# EAGLE board durtest (EAGLE 6.0)
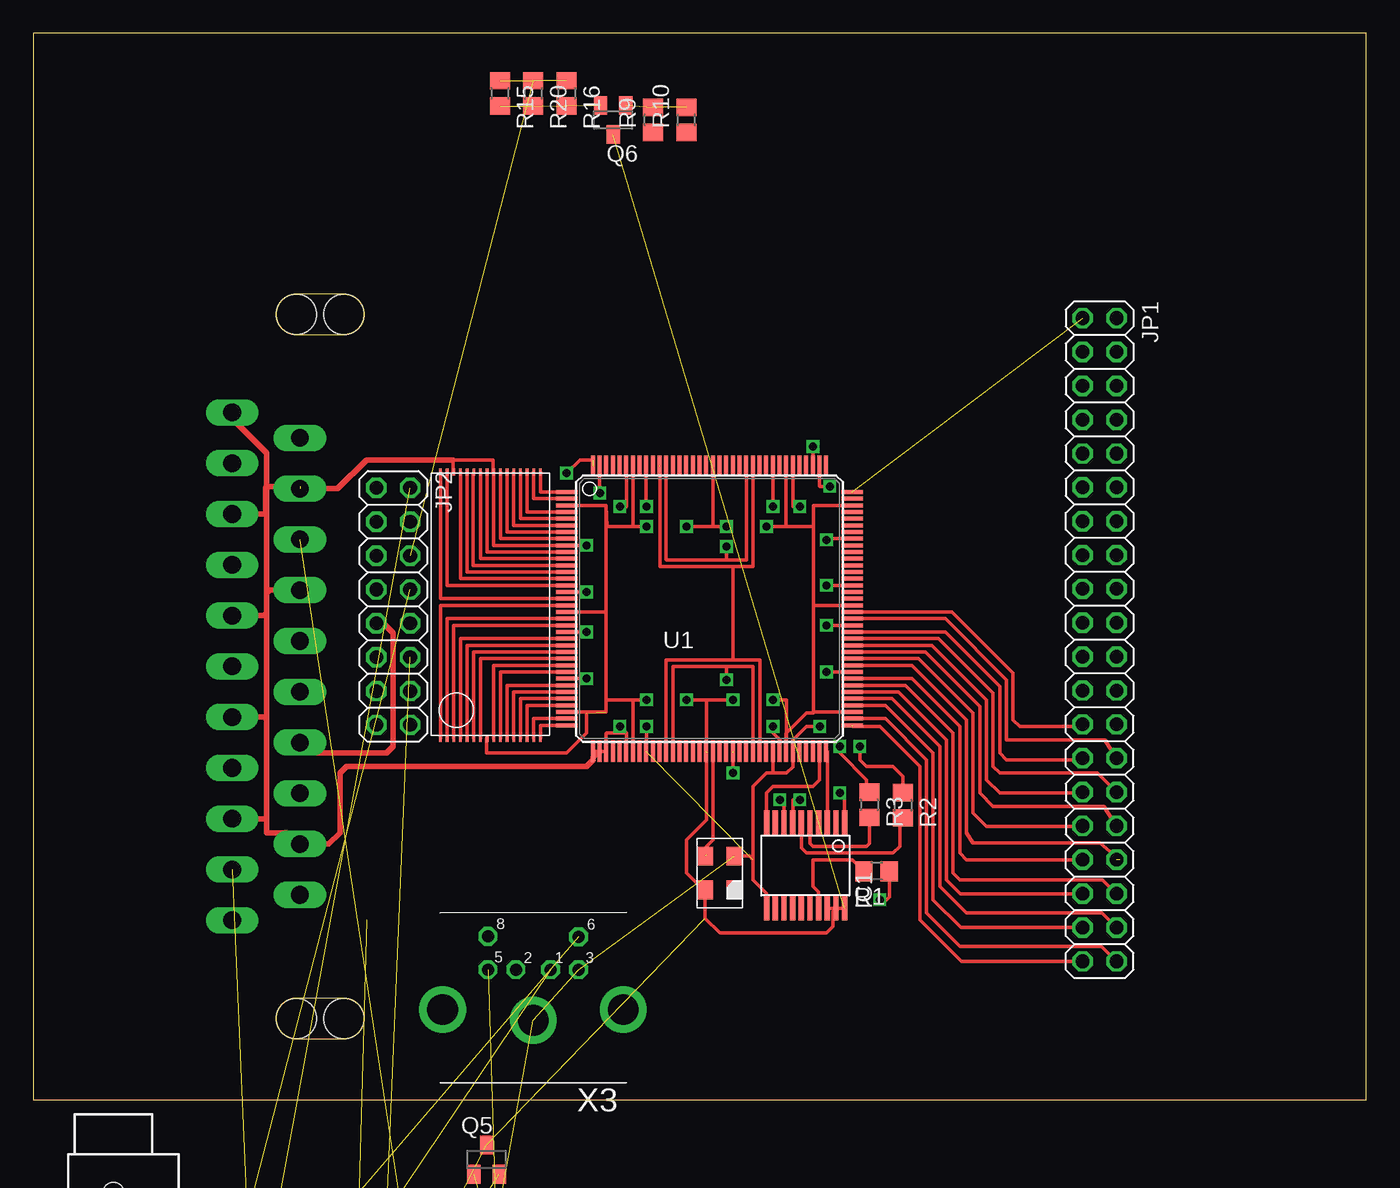
[diagram p0: board, top side]
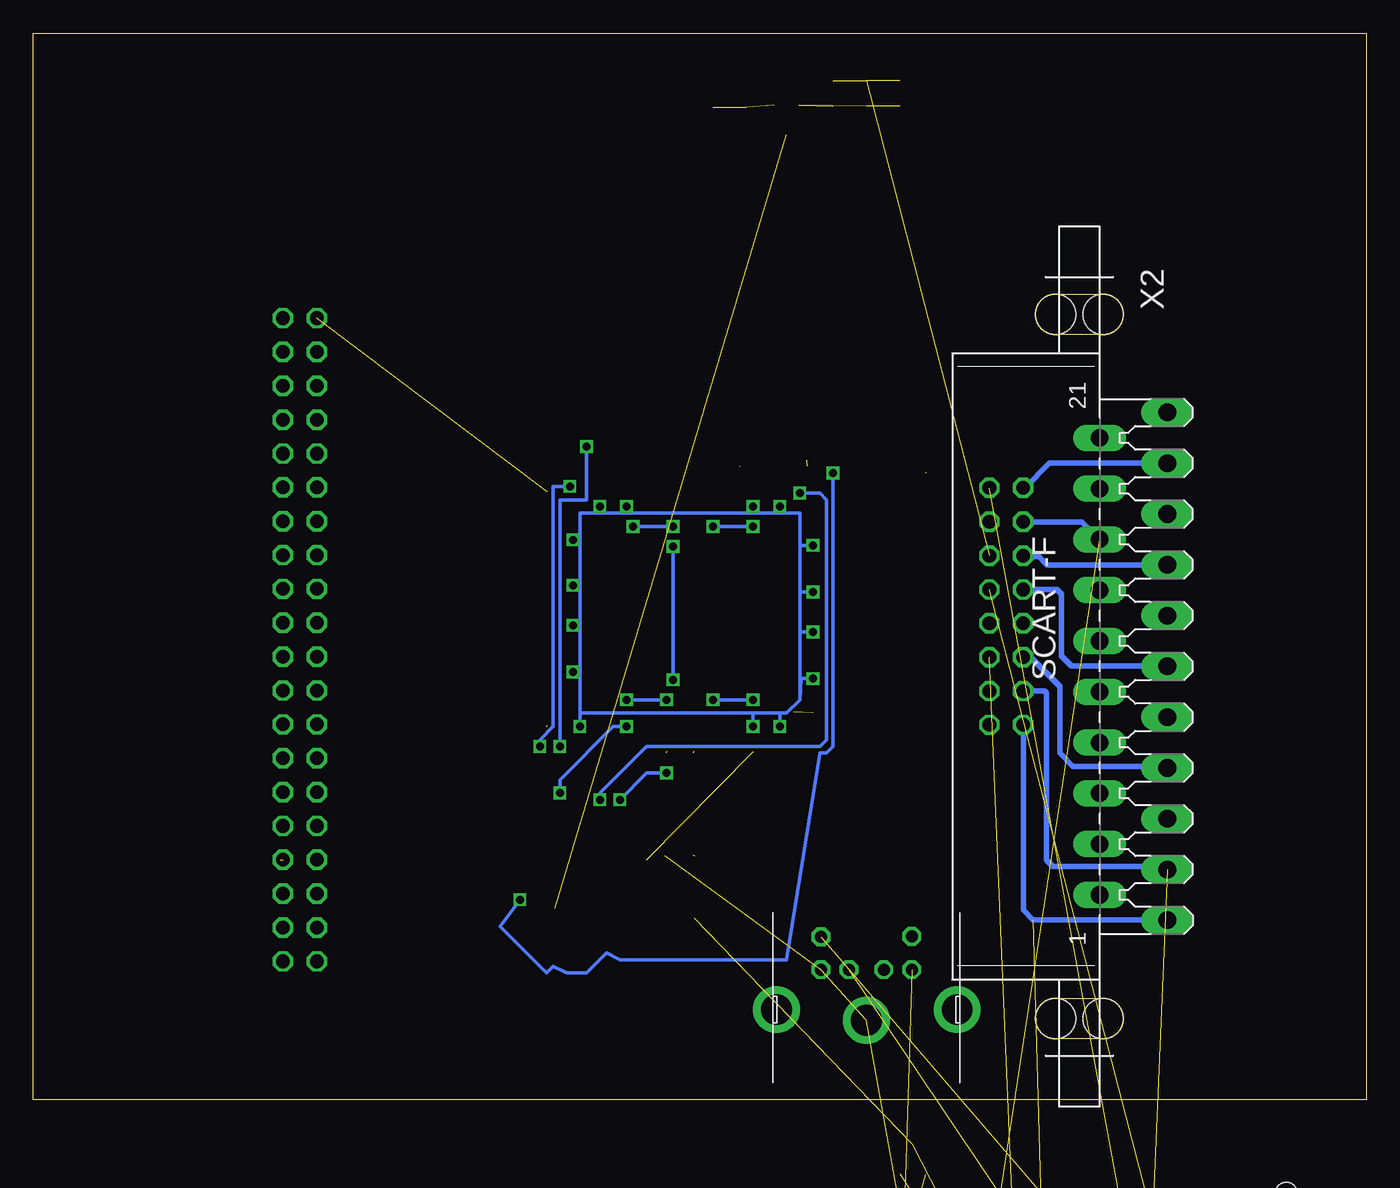
[diagram p1: board, bottom side, seen from below]

Size 100 x 80 mm. Coordinates in mm from the lower left corner, seen from the top.
Outline: 0,0 100,0 100,80 0,80 0,0
Copper layers (1*16): Top 0.0356mm / dielectric 1.5011mm / Bottom 0.0356mm
Design rules: minimum track width 6mil, minimum drill 13mil, track to track 6mil, track to pad 6mil, pad to pad 6mil, via to via 6mil, smd to smd 6mil, copper to edge 15mil, drill to drill 6mil, minimum pad ring 7mil, minimum via ring 7mil, stop-mask expansion 4mil, vias tented up to drill 0mil, thermal gap 10mil
Net classes: 1 power: width 0.6 mm, drill 1.1 mm, clearance 0.4 mm

## Footprints (pad centres in the part's own frame; a part is rotated, then mirrored left to right if it is on the bottom)
C0603 = smd 1.1 x 1: 1 -0.85,0; 2 0.85,0
VO20 = smd 0.4 x 1.8: 1 5.85,6.15; 2 5.2,6.15; 3 4.55,6.15; 4 3.9,6.15; 5 3.25,6.15; 6 2.6,6.15; 7 1.95,6.15; 8 1.3,6.15; 9 0.65,6.15; 10 0,6.15; 11 0,-0.3; 12 0.65,-0.3; 13 1.3,-0.3; 14 1.95,-0.3; 15 2.6,-0.3; 16 3.25,-0.3; 17 3.9,-0.3; 18 4.55,-0.3; 19 5.2,-0.3; 20 5.85,-0.3
2X20 = drill 1.016 octagon: 1 -24.13,-1.27; 2 -24.13,1.27; 3 -21.59,-1.27; 4 -21.59,1.27; 5 -19.05,-1.27; 6 -19.05,1.27; 7 -16.51,-1.27; 8 -16.51,1.27; 9 -13.97,-1.27; 10 -13.97,1.27; 11 -11.43,-1.27; 12 -11.43,1.27; 13 -8.89,-1.27; 14 -8.89,1.27; 15 -6.35,-1.27; 16 -6.35,1.27; 17 -3.81,-1.27; 18 -3.81,1.27; 19 -1.27,-1.27; 20 -1.27,1.27; 21 1.27,-1.27; 22 1.27,1.27; 23 3.81,-1.27; 24 3.81,1.27; 25 6.35,-1.27; 26 6.35,1.27; 27 8.89,-1.27; 28 8.89,1.27; 29 11.43,-1.27; 30 11.43,1.27; 31 13.97,-1.27; 32 13.97,1.27; 33 16.51,-1.27; 34 16.51,1.27; 35 19.05,-1.27; 36 19.05,1.27; 37 21.59,-1.27; 38 21.59,1.27; 39 24.13,-1.27; 40 24.13,1.27
2X08 = drill 1.016 octagon: 1 -8.89,-1.27; 2 -8.89,1.27; 3 -6.35,-1.27; 4 -6.35,1.27; 5 -3.81,-1.27; 6 -3.81,1.27; 7 -1.27,-1.27; 8 -1.27,1.27; 9 1.27,-1.27; 10 1.27,1.27; 11 3.81,-1.27; 12 3.81,1.27; 13 6.35,-1.27; 14 6.35,1.27; 15 8.89,-1.27; 16 8.89,1.27
SOT23 = smd 1 x 1.4: 1 -0.95,-1.1; 2 0.95,-1.1; 3 0,1.1
R0805 = smd 1.3 x 1.5: 1 -0.95,0; 2 0.95,0
M0805 = smd 1.3 x 1.6: 1 -0.95,0; 2 0.95,0
SOT-23 = smd 0.787 x 0.889: 1 0.025,-1.016; 2 -0.94,1.016; 3 0.991,1.016
TQ144 = smd 1.6 x 0.3: P1 -10.7,8.75; P2 -10.7,8.25; P3 -10.7,7.75; P4 -10.7,7.25; P5 -10.7,6.75; P6 -10.7,6.25; P7 -10.7,5.75; P8 -10.7,5.25; P9 -10.7,4.75; P10 -10.7,4.25; P11 -10.7,3.75; P12 -10.7,3.25; P13 -10.7,2.75; P14 -10.7,2.25; P15 -10.7,1.75; P16 -10.7,1.25; P17 -10.7,0.75; P18 -10.7,0.25; P19 -10.7,-0.25; P20 -10.7,-0.75; P21 -10.7,-1.25; P22 -10.7,-1.75; P23 -10.7,-2.25; P24 -10.7,-2.75; P25 -10.7,-3.25; P26 -10.7,-3.75; P27 -10.7,-4.25; P28 -10.7,-4.75; P29 -10.7,-5.25; P30 -10.7,-5.75; P31 -10.7,-6.25; P32 -10.7,-6.75; P33 -10.7,-7.25; P34 -10.7,-7.75; P35 -10.7,-8.25; P36 -10.7,-8.75; P73 10.7,-8.75; P74 10.7,-8.25; P75 10.7,-7.75; P76 10.7,-7.25; P77 10.7,-6.75; P78 10.7,-6.25; P79 10.7,-5.75; P80 10.7,-5.25; P81 10.7,-4.75; P82 10.7,-4.25; P83 10.7,-3.75; P84 10.7,-3.25; P85 10.7,-2.75; P86 10.7,-2.25; P87 10.7,-1.75; P88 10.7,-1.25; P89 10.7,-0.75; P90 10.7,-0.25; P91 10.7,0.25; P92 10.7,0.75; P93 10.7,1.25; P94 10.7,1.75; P95 10.7,2.25; P96 10.7,2.75; P97 10.7,3.25; P98 10.7,3.75; P99 10.7,4.25; P100 10.7,4.75; P101 10.7,5.25; P102 10.7,5.75; P103 10.7,6.25; P104 10.7,6.75; P105 10.7,7.25; P106 10.7,7.75; P107 10.7,8.25; P108 10.7,8.75 | smd 0.3 x 1.6: P37 -8.75,-10.7; P38 -8.25,-10.7; P39 -7.75,-10.7; P40 -7.25,-10.7; P41 -6.75,-10.7; P42 -6.25,-10.7; P43 -5.75,-10.7; P44 -5.25,-10.7; P45 -4.75,-10.7; P46 -4.25,-10.7; P47 -3.75,-10.7; P48 -3.25,-10.7; P49 -2.75,-10.7; P50 -2.25,-10.7; P51 -1.75,-10.7; P52 -1.25,-10.7; P53 -0.75,-10.7; P54 -0.25,-10.7; P55 0.25,-10.7; P56 0.75,-10.7; P57 1.25,-10.7; P58 1.75,-10.7; P59 2.25,-10.7; P60 2.75,-10.7; P61 3.25,-10.7; P62 3.75,-10.7; P63 4.25,-10.7; P64 4.75,-10.7; P65 5.25,-10.7; P66 5.75,-10.7; P67 6.25,-10.7; P68 6.75,-10.7; P69 7.25,-10.7; P70 7.75,-10.7; P71 8.25,-10.7; P72 8.75,-10.7; P109 8.75,10.7; P110 8.25,10.7; P111 7.75,10.7; P112 7.25,10.7; P113 6.75,10.7; P114 6.25,10.7; P115 5.75,10.7; P116 5.25,10.7; P117 4.75,10.7; P118 4.25,10.7; P119 3.75,10.7; P120 3.25,10.7; P121 2.75,10.7; P122 2.25,10.7; P123 1.75,10.7; P124 1.25,10.7; P125 0.75,10.7; P126 0.25,10.7; P127 -0.25,10.7; P128 -0.75,10.7; P129 -1.25,10.7; P130 -1.75,10.7; P131 -2.25,10.7; P132 -2.75,10.7; P133 -3.25,10.7; P134 -3.75,10.7; P135 -4.25,10.7; P136 -4.75,10.7; P137 -5.25,10.7; P138 -5.75,10.7; P139 -6.25,10.7; P140 -6.75,10.7; P141 -7.25,10.7; P142 -7.75,10.7; P143 -8.25,10.7; P144 -8.75,10.7
TSOP32 = smd 0.5 x 0.2: P1 -9.75,3.75; P2 -9.75,3.25; P3 -9.75,2.75; P4 -9.75,2.25; P5 -9.75,1.75; P6 -9.75,1.25; P7 -9.75,0.75; P8 -9.75,0.25; P9 -9.75,-0.25; P10 -9.75,-0.75; P11 -9.75,-1.25; P12 -9.75,-1.75; P13 -9.75,-2.25; P14 -9.75,-2.75; P15 -9.75,-3.25; P16 -9.75,-3.75; P17 10.25,-3.75; P18 10.25,-3.25; P19 10.25,-2.75; P20 10.25,-2.25; P21 10.25,-1.75; P22 10.25,-1.25; P23 10.25,-0.75; P24 10.25,-0.25; P25 10.25,0.25; P26 10.25,0.75; P27 10.25,1.25; P28 10.25,1.75; P29 10.25,2.25; P30 10.25,2.75; P31 10.25,3.25; P32 10.25,3.75
OSC_7C = smd 1.4 x 1.2: ENA -1.27,-1.1; GND 1.27,-1.1; OUT 1.27,1.1; VDD -1.27,1.1
1503_04 = drill 0.8 pad 1.2 long: 1 3.9,-10.25; 2 0.65,-10.25 | drill 1 pad 1.2 long: 3 -2.3,-10.25 | hole 1.6: 0,0
SCART-F = drill 1.321 long: 1 19.05,5.08; 2 17.145,0; 3 15.24,5.08; 4 13.335,0; 5 11.43,5.08; 6 9.525,0; 7 7.62,5.08; 8 5.715,0; 9 3.81,5.08; 10 1.905,0; 11 0,5.08; 12 -1.905,0; 13 -3.81,5.08; 14 -5.715,0; 15 -7.62,5.08; 16 -9.525,0; 17 -11.43,5.08; 18 -13.335,0; 19 -15.24,5.08; 20 -17.145,0; 21 -19.05,5.08 | hole 3.023: 26.416,0.254; 26.416,-3.302; -26.416,0.254; -26.416,-3.302
M_DIN6 = drill 0.9 pad 1.422 octagon: 1 -1.3,-3.75; 2 1.3,-3.75; 3 -3.4,-3.75; 5 3.4,-3.75; 6 -3.4,-6.2; 8 3.4,-6.25 | drill 2.3 pad 3.5: SH1 6.8,-0.75; SH2 0,0.05; SH3 -6.75,-0.75

## Placement (x,y rotation side)
C2  100nF  [C0603]  12,-56 0 top  (outside the outline)
C3  [C0603]  28.5,-56 0 top  (outside the outline)
C4  [C0603]  32,-56 0 top  (outside the outline)
IC1  XCF02S  [VO20]  55.02,14.63 0 top
JP1  [2X20]  80,34.5 270 top
JP2  [2X08]  27,37 270 top
Q5  BC848SMD  [SOT23]  34,-4.5 0 top  (outside the outline)
Q6  BC848SMD  [SOT23]  43.5,73.5 180 top
Q7  BC848SMD  [SOT23]  13.5,-23 0 top  (outside the outline)
Q8  BC848SMD  [SOT23]  24.5,-23 0 top  (outside the outline)
R1  100  [R0805]  63.27,17.14 180 top
R2  100  [R0805]  65.24,22.08 270 top
R3  100  [R0805]  62.72,22.12 270 top
R4  10K  [R0805]  29.5,-50 0 top  (outside the outline)
R5  10K  [R0805]  35,-50 0 top  (outside the outline)
R6  10K  [R0805]  40.5,-50 0 top  (outside the outline)
R7  10K  [R0805]  2,-56.5 0 top  (outside the outline)
R8  2200  [R0805]  39,-30 0 top  (outside the outline)
R9  2200  [R0805]  46.5,73.5 90 top
R10  1000  [R0805]  49,73.5 90 top
R11  75  [R0805]  7.5,-56.5 0 top  (outside the outline)
R12  750  [R0805]  32,-43.5 0 top  (outside the outline)
R13  680  [R0805]  37.5,-43.5 0 top  (outside the outline)
R14  2200  [R0805]  14,-37 0 top  (outside the outline)
R15  270  [R0805]  35,75.5 270 top
R16  680  [R0805]  40,75.5 270 top
R17  10000  [R0805]  18,-30 0 top  (outside the outline)
R18  4700  [R0805]  20,-37 0 top  (outside the outline)
R19  10000  [R0805]  25,-30 0 top  (outside the outline)
R20  4700  [R0805]  37.5,75.5 270 top
R21  47000  [R0805]  32,-30 0 top  (outside the outline)
R22  1000  [R0805]  32,-37 0 top  (outside the outline)
R23  [M0805]  19,-56 0 top  (outside the outline)
R24  2200  [R0805]  38,-37 0 top  (outside the outline)
R25  1000  [R0805]  2,-43.5 0 top  (outside the outline)
R26  270  [R0805]  7.5,-50 0 top  (outside the outline)
R27  680  [R0805]  13,-50 0 top  (outside the outline)
R28  4700  [R0805]  8,-43.5 0 top  (outside the outline)
R29  2200  [R0805]  14,-43.5 0 top  (outside the outline)
R30  1000  [R0805]  20,-43.5 0 top  (outside the outline)
R31  270  [R0805]  18.5,-50 0 top  (outside the outline)
R32  680  [R0805]  24,-50 0 top  (outside the outline)
R33  4700  [R0805]  26,-43.5 0 top  (outside the outline)
R34  [M0805]  24,-56 0 top  (outside the outline)
T1  BSS138  [SOT-23]  2,-32 0 top  (outside the outline)
T2  BC848  [SOT23]  35.5,-23 0 top  (outside the outline)
T3  BSS138  [SOT-23]  10,-32 0 top  (outside the outline)
U1  XC3S400TQ144  [TQ144]  50.73,36.83 0 top
U$1  AS6C4008  [TSOP32]  34.29,36.83 90 top
U$2  TXO_7C  [OSC_7C]  51.5,17 90 top
X1  1503_04  [1503_04]  6,-7 0 top  (outside the outline)
X2  SCART-F  [SCART-F]  20,32.5 270 bottom
X3  [M_DIN6]  37.5,6 180 top

## Library data of the parts
C2-C4 R23 R34 = resistor
IC1 = smd-special
JP1 JP2 = pinhead
Q5-Q8 = bc548
R1-R22 R24-R33 = rcl
T1 T3 = zetex; OC_FARNELL: unknown; OC_NEWARK: unknown
T2 = transistor
U1 = xilinx_spartan3_virtex4_and_5
U$1 U$2 = cpcfpga
X1 = con-lumberg; OC_FARNELL: 1216981; OC_NEWARK: unknown
X2 = con-hirschmann; OC_FARNELL: unknown; OC_NEWARK: unknown
X3 = mini_din

## Nets
AINLEFT: X2.6
AINRIGHT: X2.2
AOUTLEFT: JP2.13 R23.1 X2.3
AOUTRIGHT: JP2.15 R34.1 X2.1
AUDLEFT: C3.2
AUDRIGHT: C4.2
B0: R30.1
B1: R29.1
BLUE: JP2.11 X2.7
CASIN: R21.2 T2.2
CLK_5V: R5.1 T1.1 X3.6
COMPIN: X2.20
COMPOUT: JP2.1 X2.19
CSYNC: R8.1
D_FASTBLANKING: JP2.3 R11.1 R12.2 X2.16
D_MODESWITCH: JP2.9 X2.8
DATA_5V: R7.1 T3.1 X3.1
G0: R25.1
G1: R24.1
GND: IC1.11 R12.1 R17.1 R19.1 R21.1 U1.P9 U1.P16 U1.P22 U1.P29 U1.P37 U1.P38 U1.P39 U1.P42 U1.P45 U1.P64 U1.P67 U1.P81 U1.P88 U1.P94 U1.P101 U1.P114 U1.P117 U1.P136 U1.P139 U$1.P24 U$1.P30 U$2.GND X1.3 X2.4 X2.5 X2.9 X2.13 X2.14 X2.17 X2.18 X2.21 X3.3 X3.SH2
GREEN: JP2.7 X2.11
N$1: U1.P1 U$1.P17
N$2: U1.P2 U$1.P18
N$3: U1.P4 U$1.P19
N$4: U1.P5 U$1.P20
N$5: U1.P6 U$1.P21
N$6: U1.P7 U$1.P22
N$7: U1.P8 U$1.P23
N$8: U1.P10 U$1.P25
N$9: U1.P11 U$1.P26
N$10: U1.P12 U$1.P27
N$11: U1.P13 U$1.P28
N$12: U1.P14 U$1.P29
N$13: U1.P15 U$1.P31
N$14: U1.P17 U$1.P32
N$15: U1.P18 U$1.P1
N$16: U1.P20 U$1.P2
N$17: U1.P21 U$1.P3
N$18: U1.P23 U$1.P4
N$19: U1.P24 U$1.P5
N$20: U1.P25 U$1.P6
N$21: U1.P26 U$1.P7
N$22: U1.P27 U$1.P9
N$23: U1.P28 U$1.P10
N$24: U1.P30 U$1.P11
N$25: U1.P31 U$1.P12
N$26: U1.P32 U$1.P13
N$27: U1.P33 U$1.P14
N$28: U1.P35 U$1.P15
N$29: U1.P36 U$1.P16
N$30: JP1.1 U1.P108
N$31: JP1.39 U1.P73
N$32: JP1.40 U1.P74
N$33: JP1.37 U1.P76
N$34: JP1.38 U1.P77
N$35: IC1.3 U1.P72
N$36: IC1.17 R1.2
N$37: JP1.35 U1.P78
N$38: IC1.10 U1.P71
N$39: R2.1 U1.P110
N$40: IC1.7 U1.P143
N$41: JP1.36 U1.P79
N$42: R1.1 U1.P144
N$43: R3.1 U1.P111
N$44: JP1.33 U1.P80
N$45: JP1.34 U1.P82
N$46: JP1.31 U1.P83
N$47: JP1.32 U1.P84
N$48: JP1.29 U1.P85
N$49: JP1.30 U1.P86
N$50: JP1.27 U1.P87
N$51: JP1.28 U1.P89
N$52: JP1.25 U1.P90
N$53: Q6.1 R9.2 R10.2
N$54: Q6.2 R15.2 R16.2 R20.2
N$55: Q8.1 R24.2 R25.2
N$56: Q8.2 R26.2 R27.2 R28.2
N$57: Q7.1 R29.2 R30.2
N$58: Q7.2 R31.2 R32.2 R33.2
N$59: Q5.2 R13.2 R14.2
N$60: C2.2 R18.1 R19.2 T2.1
N$61: C2.1 R17.2 X1.1
N$62: R18.2 R22.2
N$63: Q5.1 R8.2
N$64: C3.1 R23.2
N$65: C4.1 R34.2
N$66: U1.P55 U$2.OUT
PE1: X3.SH1
PE3: X3.SH3
PROM_DO: IC1.1 U1.P65
PROM_INITB: IC1.8 U1.P58
PS2CLK: R4.1 T1.2
PS2DAT: R6.1 T3.2
R0: R10.1
R1: R9.1
RED: JP2.5 X2.15
SCART_BLANKING: JP2.4
SCART_BLUE: JP2.12 R31.1 R32.1 R33.1
SCART_COMP: JP2.2 R13.1 R14.1
SCART_GREEN: JP2.8 R26.1 R27.1 R28.1
SCART_LEFT: JP2.14
SCART_MODE: JP2.10
SCART_RED: JP2.6 R15.1 R16.1 R20.1
SCART_RIGHT: JP2.16
TCK: IC1.6 R2.2
TDI: IC1.4
TDO: U1.P109
TMS: IC1.5 R3.2
VCC: IC1.18 IC1.19 IC1.20 Q5.3 Q6.3 Q7.3 Q8.3 U1.P3 U1.P19 U1.P34 U1.P43 U1.P54 U1.P66 U1.P75 U1.P91 U1.P106 U1.P115 U1.P126 U1.P138 U$1.P8 U$2.VDD
VCC_5V [power]: R5.2 R7.2 X3.5
VCC_B2: R4.2 R6.2 R22.1 T1.3 T2.3 T3.3
VCC_B3: R11.2
VCCAUX: U1.P48 U1.P62 U1.P120 U1.P134
VCCINT: U1.P49 U1.P61 U1.P121 U1.P133

## Tracks (layer width: path | path; a pad name or v marks a point on that pad's centre or on a via)
AOUTLEFT  (1 unrouted)
  Bottom 0.406: JP2.13 24.15,30.65 24,30.5 24,18 23.5,17.5 15.16,17.5 X2.3
AOUTRIGHT  (1 unrouted)
  Bottom 0.406: JP2.15 25.73,14.23 25,13.5 14.97,13.5 X2.1
BLUE
  Bottom 0.406: JP2.11 25.19,33.19 23,31 23,26 22,25 15.04,25 X2.7
CASIN  (1 unrouted)
CLK_5V  (2 unrouted)
COMPOUT
  Bottom 0.406: JP2.1 25.61,45.89 23.76,47.74 X2.19
D_FASTBLANKING  (2 unrouted)
  Bottom 0.406: JP2.3 21.32,43.35 X2.16
D_MODESWITCH
  Top 0.406: JP2.9 26.27,35.73 27,35 27,26.5 26.5,26 20.79,26 X2.8
DATA_5V  (2 unrouted)
GND  (via drill 0.6)  (9 unrouted)
  Top 0.254: IC1.11 55.02,15.48 54,16.5 54,18 | 54,18 54,23.5 55,24.5 55.5,24.5 | 55.5,24.5 55.5,26.11 U1.P64 | 55.5,24.5 56.5,24.5 56.98,24.98 U1.P67 56.98,26.98 58,28 v59,28 | U1.P139 44.5,47.53 44.5,44.5 v44,44.5 | U1.P16 v41.5,38.08 | v41.5,41.58 U1.P9 34.54,41.58 U$1.P24 34.5,47.08 34.5,48 31.5,48 31.5,47.08 U$1.P30 | U1.P22 v41.5,35.08 | U1.P29 v41.5,31.58 | U1.P94 v59.5,38.58 | U1.P81 v59.5,32.08 | U1.P88 v59.5,35.58 | U1.P45 46,26.13 v46,28 | U1.P42 44.5,26.13 44.5,27.5 | 44.5,27.5 v44,28 | U1.P37 U1.P38 U1.P39 42.98,27.48 43,27.5 44.5,27.5 | U1.P136 45.98,44.52 v46,44.5 | U1.P114 56.98,46.52 57,45 57,44.5 v57.5,44.5 | U1.P117 55.48,46.52 v55.5,44.5 | U1.P101 59.58,42.08 v59.5,42 | U$2.GND 53.73,18.27 54,18
  Top 0.406: X2.18 22.84,45.84 25,48 31.5,48 | X2.4 22.16,19.16 23,20 23,24.5 23.5,25 41.5,25 42,25.5 42,25.66 U1.P38 | X2.21 14.92,51.08 17.5,48.5 17.5,46 | 17.5,46 17.5,44 | 17.5,44 17.5,38 | 17.5,38 17.5,36.5 | 17.5,36.5 17.5,28.5 | 17.5,28.5 17.5,21 | 17.5,21 17.5,20 19,20 20,19 | 17.5,44 17.43,43.93 17.43,44 | X2.14 17.71,38.22 17.5,38 | X2.13 17.31,36.31 17.5,36.5 | X2.9 17.31,28.69 17.5,28.5 | 17.43,44 17.43,45.93 17.5,46 | 17.5,46 20,46 | X2.17 17.36,43.93 17.43,44 | X2.5 17.43,21.07 17.5,21
  Bottom 0.254: v41.5,41.58 42.42,41.58 | 42.42,41.58 42.5,41.5 42.5,38 | v41.5,38.08 42.42,38.08 42.5,38 | v41.5,35.08 42.42,35.08 42.5,35 | 42.5,35 42.5,38 | v41.5,31.58 42.42,31.58 42.5,30 | 42.5,30 42.5,35 | v44,28 44,29 | 44,29 43.5,29 42.5,30 | v46,28 46,29 | 46,29 44,29 | 42.42,41.58 42.5,41.66 42.5,44 44,44 | 44,44 v44,44.5 | v46,44.5 46,44 | 46,44 44,44 | v57.5,44.5 57.5,44 | 57.5,44 59,44 59,42 | 59,42 59,38.5 | 59,35.5 59,32 | 59,32 59,29 | v55.5,44.5 55.5,44 | 55.5,44 57.5,44 | v59.5,42 59,42 | v59.5,38.58 59.08,38.58 59,38.5 | v59.5,35.58 59.08,35.58 59,35.5 | v59.5,32.08 59.08,32.08 59,32 | 59,35.5 59,38.5 | 55.5,44 46,44 | 59,29 46,29 | v59,28 59,29
GREEN
  Bottom 0.406: JP2.7 23.22,38.27 22.89,37.94 22.89,33.29 22.12,32.52 14.95,32.52 X2.11
N$1
  Top 0.254: U1.P1 38.04,45.58 U$1.P17
N$2
  Top 0.254: U1.P2 37.54,45.08 U$1.P18
N$3
  Top 0.254: U1.P4 37.04,44.08 U$1.P19
N$4
  Top 0.254: U1.P5 36.54,43.58 U$1.P20
N$5
  Top 0.254: U1.P6 36.04,43.08 U$1.P21
N$6
  Top 0.254: U1.P7 35.54,42.58 U$1.P22
N$7
  Top 0.254: U1.P8 35.04,42.08 U$1.P23
N$8
  Top 0.254: U1.P10 34.04,41.08 U$1.P25
N$9
  Top 0.254: U1.P11 33.54,40.58 U$1.P26
N$10  (1 unrouted)
  Top 0.254: U1.P12 33,40.08 33,47
N$11
  Top 0.254: U1.P13 32.54,39.58 U$1.P28
N$12
  Top 0.254: U1.P14 32.04,39.08 U$1.P29
N$13
  Top 0.254: U1.P15 31.04,38.58 U$1.P31
N$14
  Top 0.254: U1.P17 30.54,37.58 U$1.P32
N$15
  Top 0.254: U1.P18 30.54,37.08 U$1.P1
N$16
  Top 0.254: U1.P20 31.04,36.08 U$1.P2
N$17
  Top 0.254: U1.P21 31.54,35.58 U$1.P3
N$18
  Top 0.254: U1.P23 32.04,34.58 U$1.P4
N$19
  Top 0.254: U1.P24 32.54,34.08 U$1.P5
N$20
  Top 0.254: U1.P25 33.04,33.58 U$1.P6
N$21
  Top 0.254: U1.P26 33.54,33.08 U$1.P7
N$22
  Top 0.254: U1.P27 34.54,32.58 U$1.P9
N$23
  Top 0.254: U1.P28 35.04,32.08 U$1.P10
N$24
  Top 0.254: U1.P30 35.54,31.08 U$1.P11
N$25
  Top 0.254: U1.P31 36.04,30.58 U$1.P12
N$26
  Top 0.254: U1.P32 36.54,30.08 U$1.P13
N$27
  Top 0.254: U1.P33 37.04,29.58 U$1.P14
N$28
  Top 0.254: U1.P35 37.54,28.58 U$1.P15
N$29
  Top 0.254: U1.P36 38.04,28.08 U$1.P16
N$30  (1 unrouted)
N$31  (1 unrouted)
  Top 0.254: JP1.39 69.63,10.37 66.5,13.5 66.5,25 63.5,28 61.5,28
N$32
  Top 0.254: U1.P74 63.92,28.58 67,25.5 67,14 69.5,11.5 80.14,11.5 JP1.40
N$33
  Top 0.254: JP1.37 69.59,12.91 67.5,15 67.5,26 63.92,29.58 U1.P76
N$34
  Top 0.254: U1.P77 64.42,30.08 68,26.5 68,16 70,14 80.18,14 JP1.38
N$35
  Top 0.254: U1.P72 59.57,26.13 IC1.3
N$36
  Top 0.254: IC1.17 58.92,15.58 58.5,16 58.5,18 61.45,18 R1.2
N$37
  Top 0.254: JP1.35 69.55,15.45 68.5,16.5 68.5,27 64.92,30.58 U1.P78
N$38
  Top 0.254: U1.P71 58.98,23.98 58.5,23.5 55.5,23.5 55,23 55,20.8 IC1.10
N$39  (via drill 0.6)
  Top 0.254: U1.P110 58.98,46.02 59,46 v59.75,46.01 | v62,26.5 62,25.5 62.5,25 64.5,25 65.24,24.26 R2.1
  Bottom 0.254: v59.75,46.01 61,46 61,28 62,27 v62,26.5
N$40  (via drill 0.6)
  Top 0.254: U1.P143 42.48,46.02 42.5,46 v42.5,45.5 | v57.5,22.5 57,22.5 57,20.81 IC1.7
  Bottom 0.254: v42.5,45.5 41,45.5 40.5,45 40.5,27 41,26.5 54,26.5 57.5,23 v57.5,22.5
N$41
  Top 0.254: U1.P79 65.42,31.08 69,27.5 69,17 69.5,16.5 80.22,16.5 JP1.36
N$42  (via drill 0.6)  (1 unrouted)
  Top 0.254: R1.1 64.22,15.22 64,15 v63.5,15 | v40,47 41,48 42,48
  Bottom 0.254: v63.5,15 65,13 61.5,9.5 61,10 60,9.5 58.5,9.5 57,11 56,10.5 43.5,10.5 41,26 40.5,26 40,26.5 v40,47
N$43  (via drill 0.6)
  Top 0.254: U1.P111 58.48,48.98 v58.5,49 | 62.66,23 R3.1 62.5,23.29 62.5,24 60.5,26 v60.5,26.5
  Bottom 0.254: v58.5,49 58.5,45 60.5,45 v60.5,26.5
N$44
  Top 0.254: U1.P80 65.92,31.58 69.5,28 69.5,18.5 70,18 JP1.33
N$45  (1 unrouted)
  Top 0.254: U1.P82 65.92,32.58 70,28.5 70,20 70.5,19.25 80,19.25 81.5,18
N$46
  Top 0.254: U1.P83 66.42,33.08 70.5,29 70.5,21.5 71.5,20.5 78.7,20.5 JP1.31
N$47
  Top 0.254: U1.P84 66.92,33.58 71,29.5 71,23 72,22 80.3,22 JP1.32
N$48
  Top 0.254: U1.P85 67.42,34.08 71.5,30 71.5,24 72.5,23 78.66,23 JP1.29
N$49
  Top 0.254: U1.P86 67.92,34.58 72,30.5 72,25 72.5,24.5 79.84,24.5 JP1.30
N$50
  Top 0.254: U1.P87 68.42,35.08 72.5,31 72.5,26 73,25.5 78.62,25.5 JP1.27
N$51
  Top 0.254: U1.P89 68.42,36.08 73,31.5 73,27 80.38,27 JP1.28
N$52
  Top 0.254: U1.P90 68.92,36.58 73.5,32 73.5,28.5 74,28 78.58,28 JP1.25
N$53  (2 unrouted)
N$54  (3 unrouted)
N$55  (2 unrouted)
N$56  (3 unrouted)
N$57  (2 unrouted)
N$58  (3 unrouted)
N$59  (2 unrouted)
N$60  (3 unrouted)
N$61  (2 unrouted)
N$62  (1 unrouted)
N$63  (1 unrouted)
N$64  (1 unrouted)
N$65  (1 unrouted)
N$66  (1 unrouted)
  Top 0.254: U1.P55 50.98,19.48 50.5,19 50.5,18.37
PROM_DO  (via drill 0.6)
  Top 0.254: IC1.1 60.87,22.63 v60.5,23 | v55.5,28 55.5,27.5 56,27 56,26.16 U1.P65
  Bottom 0.254: v60.5,23 60.5,24 56.5,28 v55.5,28
PROM_INITB  (via drill 0.6)  (1 unrouted)
  Top 0.254: IC1.8 56.32,22.18 v56,22.5 | v52.5,24.5 52.5,26
  Bottom 0.254: v56,22.5 54,24.5 v52.5,24.5
PS2CLK  (1 unrouted)
PS2DAT  (1 unrouted)
RED
  Bottom 0.406: X2.15 23.95,40.12 24.56,40.74 25.66,40.74 JP2.5
SCART_BLUE  (3 unrouted)
SCART_COMP  (2 unrouted)
SCART_GREEN  (3 unrouted)
SCART_RED  (3 unrouted)
TCK
  Top 0.254: IC1.6 57.62,18.88 58,18.5 64.5,18.5 65,19 65,20.89 R2.2
TMS
  Top 0.254: R3.2 62.72,19.22 62.5,19 58.5,19 58.27,19.23 IC1.5
VCC  (via drill 0.6)  (6 unrouted)
  Top 0.254: U1.P3 42.95,44.58 | 42.95,44.58 42.95,36.58 | 42.95,36.58 40.1,36.58 U1.P19 | U1.P34 42.95,29.08 42.95,30 | 42.95,30 42.95,36.58 | U1.P106 58.55,44.58 58.55,43 | 58.55,29.08 58.55,37.08 | 58.55,37.08 58.55,43 | U1.P91 58.55,37.08 | IC1.19 IC1.20 | U1.P75 58.55,29.08 | 58.55,29.08 58.55,29 58,29 56.48,27.48 U1.P66 56.5,26.13 56.5,30 v55.5,30 | U1.P43 45,26.16 45,30 | U1.P138 44.98,43.02 45,43 | 45,43 43.03,43 42.95,44.58 | U1.P115 56.48,43.02 56.5,43 | 56.5,43 58.55,43 | U1.P126 51,47.53 51,43 | 51,43 v49,43 | v46,43 45,43 | 51,43 v52,43 | v55,43 56.5,43 | 45,30 42.95,30 | U1.P54 50.5,26.13 50.5,30 | 50.5,30 v49,30 | v46,30 45,30 | v52.5,30 50.5,30 | U$1.P8 34,27.08 34,26 40,26 41.5,27.5 41.5,29 | IC1.19 IC1.18 | 50.5,26 50.5,21 49,19.5 49,17 50.27,15.73 U$2.VDD 50.4,13.6 51.5,12.5 59.5,12.5 60,13 60,14.11 IC1.19
  Bottom 0.254: v49,43 v46,43 | v52,43 v55,43 | v49,30 v46,30 | v55.5,30 v52.5,30
VCC_5V  (2 unrouted)
VCC_B2  (5 unrouted)
VCCAUX  (1 unrouted)
  Top 0.254: U1.P120 54,47.53 54,40 52.5,40 | 52.5,40 47,40 47,47.5 | U1.P62 54.5,26.13 54.5,33 52.5,33 | 52.5,33 47.48,33 U1.P48 | 52.5,33 52.5,40
VCCINT  (via drill 0.6)
  Top 0.254: U1.P61 54,26.13 54,32.5 52,32.5 | 52,32.5 47.98,32.5 U1.P49 | U1.P133 47.48,40.52 47.5,40.5 52,40.5 | 52,40.5 53.5,40.5 53.5,47.51 U1.P121 | 52,32.5 v52,31.5 | v52,41.5 52,40.5
  Bottom 0.254: v52,31.5 v52,41.5